# Altium PCB open-cal-board-1point2in.PcbDoc
Units mm, origin at the board's own origin, x right, y up, seen from the top; angles counter-clockwise.
Board outline 37 x 16 mm, 4 copper layers (Top Layer, Mid-Layer 1, Mid-Layer 2, Bottom Layer), stack 1.105 mm thick; 2 components, 1 nets, 10 pads, 150 vias.
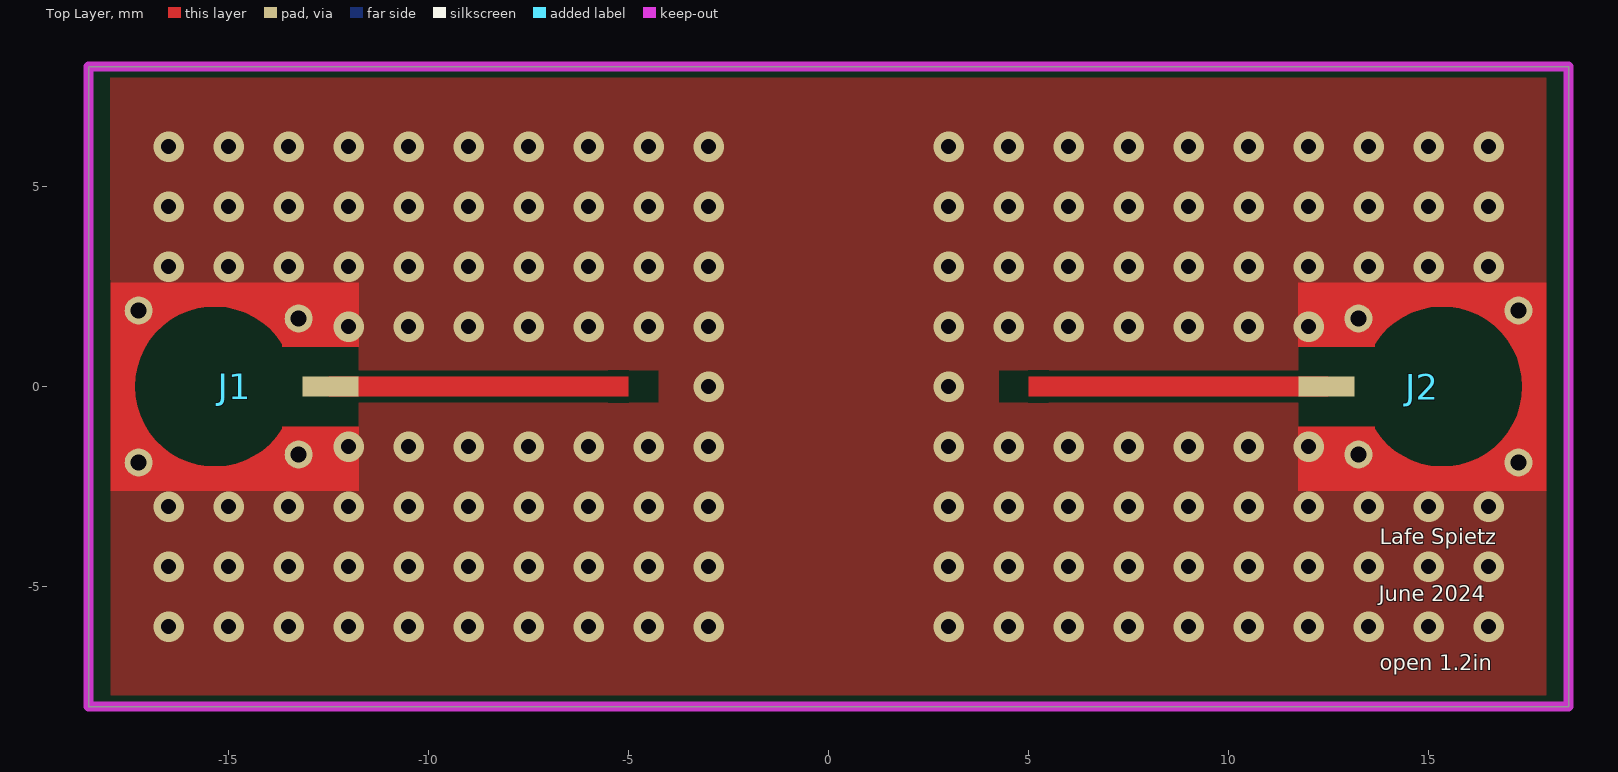
[diagram p0: Top Layer view]
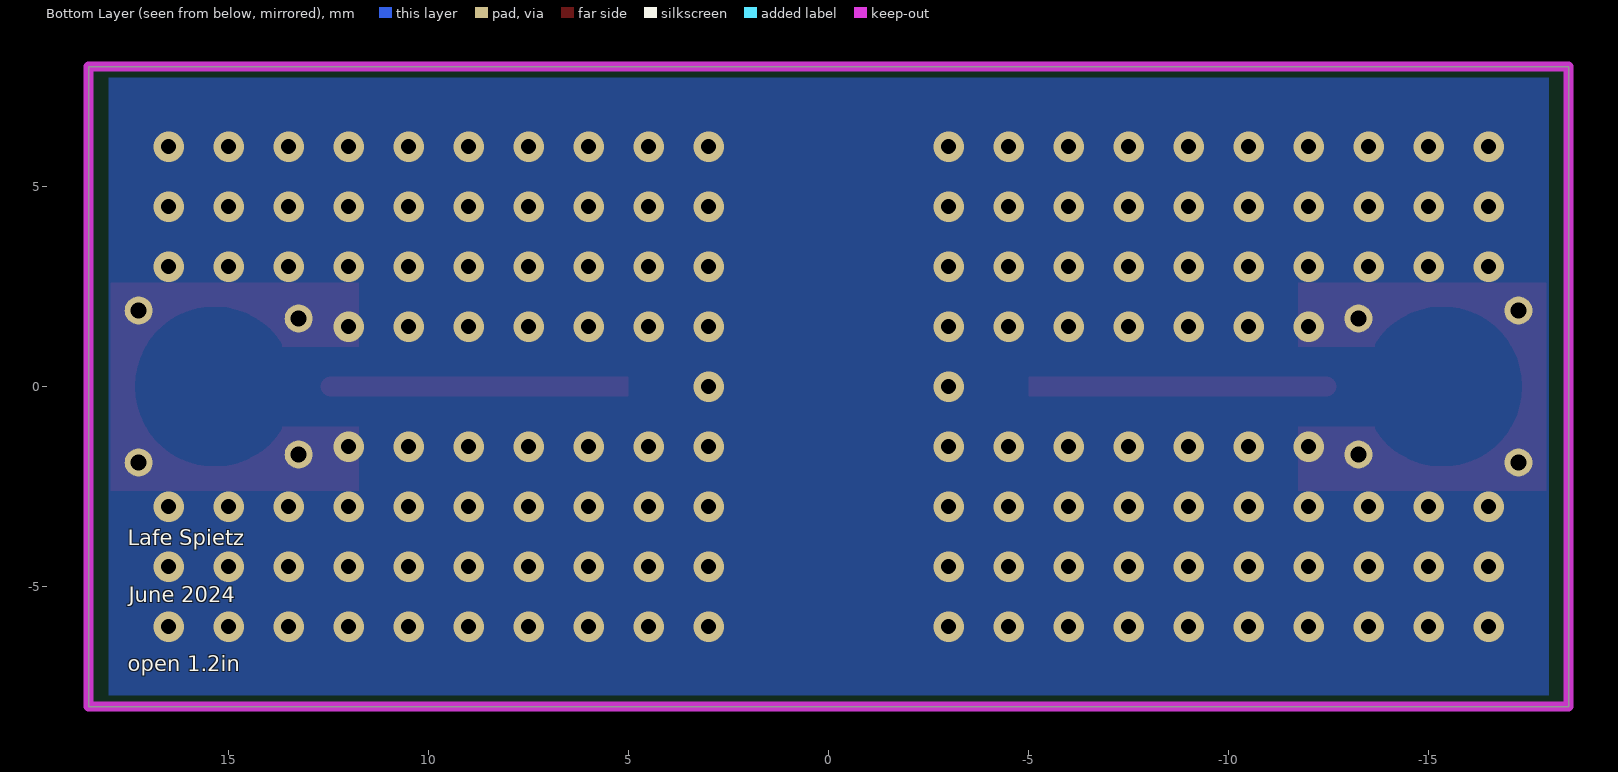
[diagram p1: Bottom Layer view, seen from below]
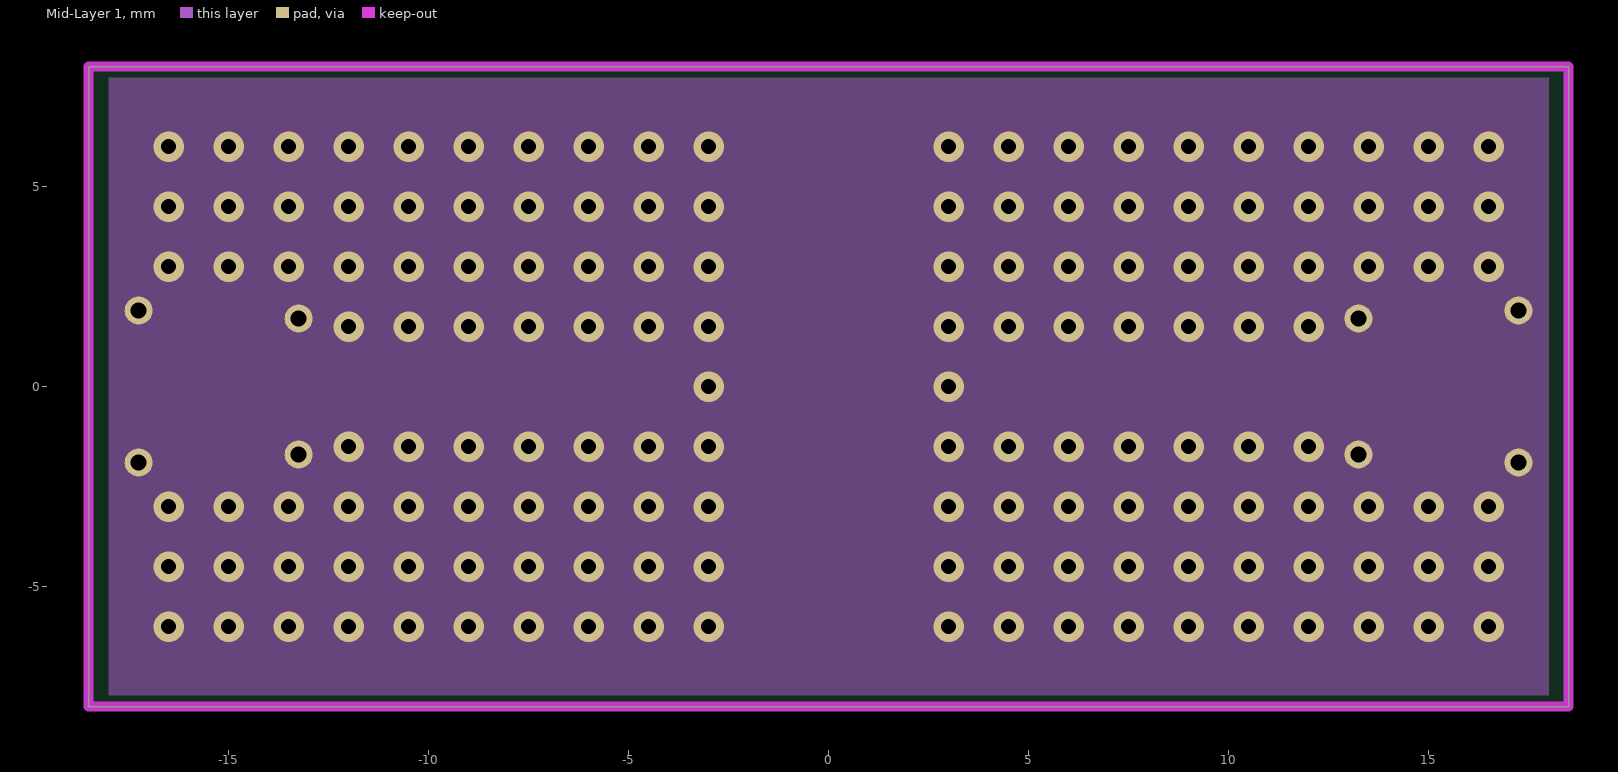
[diagram p2: Mid-Layer 1]
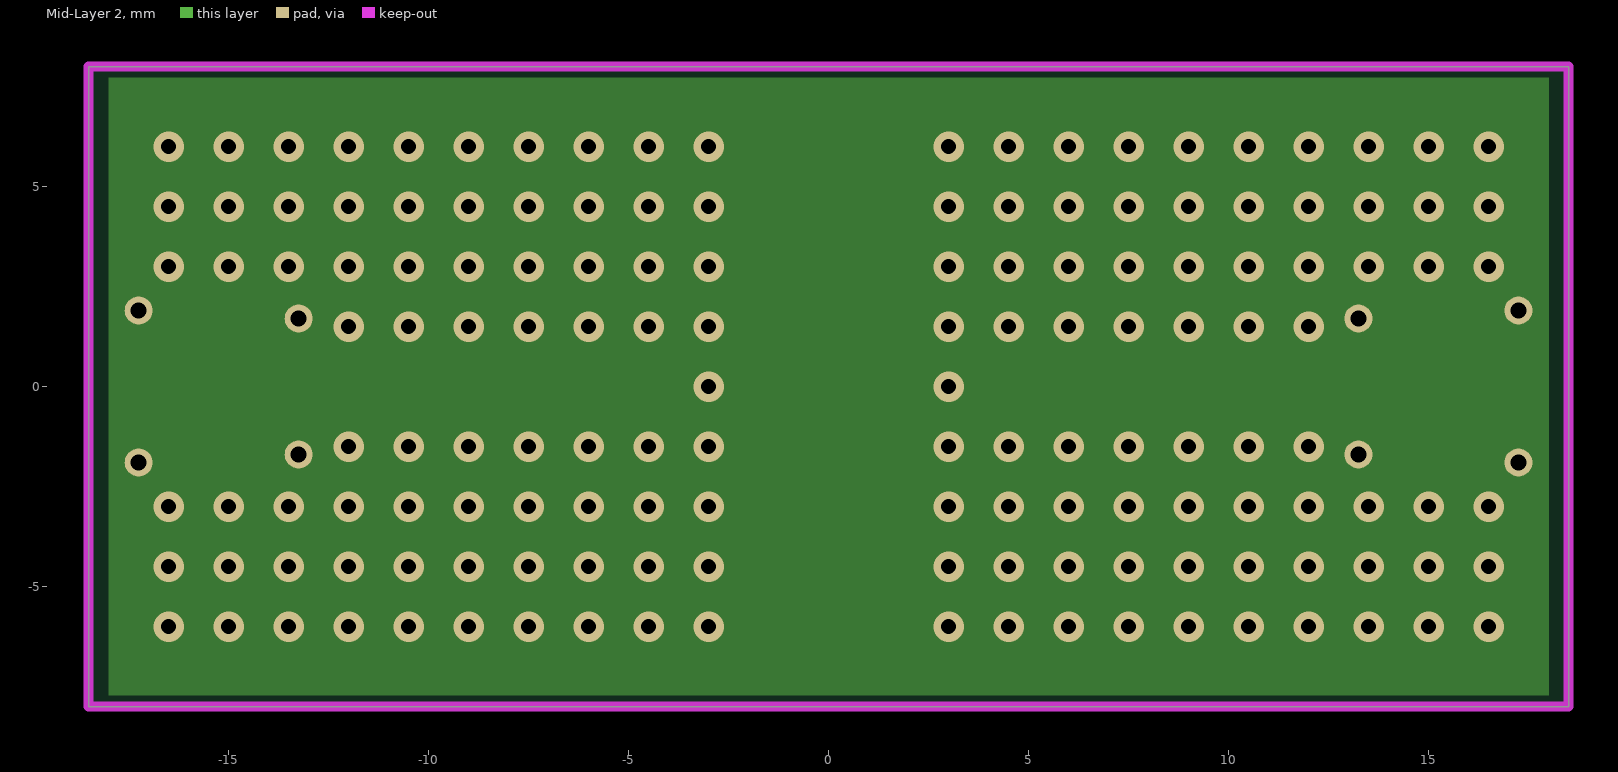
[diagram p3: Mid-Layer 2]

## Layer stack, top to bottom
Top Solder: solder mask 0.0254, SM-001, Dk 4
Top Layer: signal copper 0.035
Core1: dielectric 0.254, RO4350B, Dk 3.48
Mid-Layer 1: signal copper 0.035
Dielectric 1: prepreg 0.1778, PR7628, Dk 4.24
Dielectric 2: prepreg 0.1016, PR2116, Dk 4.17
Dielectric 3: prepreg 0.1778, PR7628, Dk 4.24
Mid-Layer 2: signal copper 0.035
Core2: dielectric 0.254, RO-4350B, Dk 3.48
Bottom Layer: signal copper 0.035
Bottom Solder: solder mask 0.0254, SM-001, Dk 4

## Board outline
-18.5,-8 -18.5,8 18.5,8 18.5,-8

## Design rules (kind name [scope] priority, off if disabled: settings)
Clearance [All] p1: gap=0.254 ignorepadtopadclearanceinfootprint=FALSE except(0: Track-Fill Track-Region Poly-Poly Poly-Region Poly-Hole; 0.095: SMDPad-Region Region-Region; 0.1: Track-Track Track-SMDPad SMDPad-Poly Via-Poly; 0.152: Arc-Poly Track-Poly Fill-Fill Fill-Poly; 0.203: Arc-SMDPad; 0.229: SMDPad-SMDPad)
PolygonConnect [All] p1: connectstyle=Direct reliefconductorwidth=0.254 reliefentries=4 polygonreliefangle="90 Angle" airgapwidth=0.254
RoutingVias [All] p1: holewidth=0.381 width=0.635 viastyle="Through Hole" minholewidth=0.127 minwidth=0.254 maxholewidth=0.711 maxwidth=1.27
SolderMaskExpansion [All] p1: expansion=0.102 istentingtop=FALSE
Width [All] p1 off: maxlimit=0.55 minlimit=0.1 preferedwidth=0.254 toplayer_prefwidth=0.1 midlayer1_minwidth=0.254 midlayer1_maxwidth=0.254 midlayer2_minwidth=0.254 midlayer2_maxwidth=0.254 bottomlayer_minwidth=0.254 bottomlayer_maxwidth=0.254 minimp=50.000000 maximp=50.000000 favimp=50.000000
Width cpw-Z-1 [All] p2 off: maxlimit=0.5 minlimit=0.174 preferedwidth=0.254 toplayer_minwidth=0.323 toplayer_prefwidth=0.406 impedanceprofiledriven=TRUE impedanceprofileid={FF6547F1-1ACB-4B88-A69B-03F59FE56022} minimp=50.000000 maximp=50.000000 favimp=50.000000
30 further rules are at their usual default settings.

## Components (designator, comment, footprint, x,y, rotation, side; value= is the part's Value field where it differs from the comment)
J1 "SMP-straight-19S141-40ML5" rosenberger-19S141-40ML5 -15.347,0 r90 top
J2 "SMP-straight-19S141-40ML5" rosenberger-19S141-40ML5 15.347,0 r270 top

## Footprints (in the part's own frame and the unit in brackets; to place one, negate y for a bottom-side part, rotate by r counter-clockwise, add the part's x,y. Pads: shape width x height; smd on the part's side, far side on the other; paste and mask are expansions set on the pad)
rosenberger-19S141-40ML5 [mm]
  rect 0.5x1.4 smd: 1(0,-2.9)
  round 0.7 hole 0.4 mask+0: gnd(-1.9,1.9) gnd(-1.7,-2.1) gnd(1.7,-2.1) gnd(1.9,1.9)
  Top Layer region: -2.6,-3.6 -2.6,2.6 2.6,2.6 2.6,-3.6 1,-3.6 1,-1.696 1.06,-1.696 1.759,-0.951 2,0.042 1.718,1.024 0.988,1.739 0,2 -0.988,1.739 -1.718,1.024 -2,0.042 -1.759,-0.951 -1.06,-1.696 -1.06,-1.696 -1,-1.696 -1,-3.6
  body extent -2.5,-3.6 2.5,2.4, height 4.1

## Part data
J1 J2: "SMP Connector Plug, Male Pin 50Ohm Surface Mount Solder", Package=None, Supplier Part Number 1=476-19S201-40ML5, Availability="In Stock", Check_prices=https://www.snapeda.com/parts/853050232/Molex/view-part/?ref=eda, MF=Molex, MP=853050232, Price=None, Purchase-URL=https://pricing.snapeda.com/search/part/853050232/?ref=eda, SnapEDA_Link=https://www.snapeda.com/parts/853050232/Molex/view-part/?ref=snap, Supplier 1=Mouser

## Via types
v1: diameter 0.762, hole 0.381, Top Layer to Bottom Layer, 150 vias

## Nets (pads, with @x,y where several pads share a name; then routed paths per layer and width w, separated by ;. In a path a pad name is that pad's centre, name@x,y a point inside that pad or via, vN(x,y) a via of type N, cw(c..) or ccw(c..) an arc to the next point about the centre after c; other vN are vias at no path point)
GND: J1.gnd J2.gnd
  other v1: -16.5,-6 -15,-6 -13.5,-6 -12,-6 -10.5,-6 -9,-6 -7.5,-6 -6,-6 -4.5,-6 -3,-6 3,-6 4.5,-6 6,-6 7.5,-6 9,-6 10.5,-6 12,-6 13.5,-6 15,-6 16.5,-6 -16.5,-4.5 -15,-4.5 -13.5,-4.5 -12,-4.5 -10.5,-4.5 -9,-4.5 -7.5,-4.5 -6,-4.5 -4.5,-4.5 -3,-4.5 3,-4.5 4.5,-4.5 6,-4.5 7.5,-4.5 9,-4.5 10.5,-4.5 12,-4.5 13.5,-4.5 15,-4.5 16.5,-4.5 -16.5,-3 -15,-3 -13.5,-3 -12,-3 -10.5,-3 -9,-3 -7.5,-3 -6,-3 -4.5,-3 -3,-3 3,-3 4.5,-3 6,-3 7.5,-3 9,-3 10.5,-3 12,-3 13.5,-3 15,-3 16.5,-3 -12,-1.5 -10.5,-1.5 -9,-1.5 -7.5,-1.5 -6,-1.5 -4.5,-1.5 -3,-1.5 3,-1.5 4.5,-1.5 6,-1.5 7.5,-1.5 9,-1.5 10.5,-1.5 12,-1.5 -3,0 3,0 -12,1.5 -10.5,1.5 -9,1.5 -7.5,1.5 -6,1.5 -4.5,1.5 -3,1.5 3,1.5 4.5,1.5 6,1.5 7.5,1.5 9,1.5 10.5,1.5 12,1.5 -16.5,3 -15,3 -13.5,3 -12,3 -10.5,3 -9,3 -7.5,3 -6,3 -4.5,3 -3,3 3,3 4.5,3 6,3 7.5,3 9,3 10.5,3 12,3 13.5,3 15,3 16.5,3 -16.5,4.5 -15,4.5 -13.5,4.5 -12,4.5 -10.5,4.5 -9,4.5 -7.5,4.5 -6,4.5 -4.5,4.5 -3,4.5 3,4.5 4.5,4.5 6,4.5 7.5,4.5 9,4.5 10.5,4.5 12,4.5 13.5,4.5 15,4.5 16.5,4.5 -16.5,6 -15,6 -13.5,6 -12,6 -10.5,6 -9,6 -7.5,6 -6,6 -4.5,6 -3,6 3,6 4.5,6 6,6 7.5,6 9,6 10.5,6 12,6 13.5,6 15,6 16.5,6
pads on no net: J1.1 J2.1
copper on no net: | length 14.1
  Top Layer w0.495: -12.447,0 -5.5,0 ; 5.25,0 12.447,0

## Polygon pours and split planes (outlines as drawn)
GND on Top Layer "NONET_L02_P-001" (solid, pour order 11): -17.951,7.9 -11.4,7.9 -11.4,2.5 -17.951,2.5
GND on Top Layer "NONET_L02_P-001" (solid, pour order 10): -17.939,-2.6 -11.4,-2.6 -11.4,-8 -17.939,-8
GND on Top Layer "NONET_L02_P-001" (solid, pour order 9): 11.5,7.9 17.947,7.9 17.947,2.5 11.5,2.5
GND on Top Layer "NONET_L02_P-001" (solid, pour order 8): 11.5,-2.6 17.947,-2.6 17.947,-8 11.5,-8
GND on Top Layer "GND_L01_P000" (solid, pour order 0): -11.747,-8 -5,-8 -5,8 -11.747,8
GND on Top Layer "NONET_L02_P-001" (solid, pour order 7): -5,-0.408 -5,-8 5,-8 5,-0.405 4.25,-0.405 4.25,0.408 5,0.408 5,8 -5,8 -5,0.407 -4.25,0.407 -4.25,-0.408
GND on Top Layer "GND_L01_P005" (solid, pour order 5): 5,-8 11.747,-8 11.747,8 5,8
GND on Mid-Layer 1 "GND_L02_P001" (solid, pour order 1): -18,8 18,8 18,-8 -18,-8
GND on Mid-Layer 2 "GND_L03_P002" (solid, pour order 2): -18,8 18,8 18,-8 -18,-8
GND on Bottom Layer "GND_L04_P003" (solid, pour order 3): -18,8 18,8 18,-8 -18,-8
no net on Bottom Solder "NONET_L02_P-001" (solid): 18,8 18,-8 -18,-8 -18,8
no net on Top Solder "NONET_L02_P-001" (solid): 13.5,-3 13.5,-8 12,-8 12,-3
no net on Top Solder "NONET_L02_P-001" (solid): 18,7.96 18,3.04 11.576,3.04 11.576,7.96
no net on Top Solder "NONET_L02_P-001" (solid): -18,8.06 -18,3.14 -11.826,3.14 -11.826,8.06
no net on Top Solder "NONET_L02_P-001" (solid): -18,-3 -18,-8 -11,-8 -11,-3

## Keep-outs
Keep-Out Layer:
  lines w0.254: -18.5,-8 5,-8 18.5,-8 18.5,8 -18.5,8 -18.5,-8

## Other copper
Top Layer:
  rectangle: -5.5,-0.25 -5,0.25
  rectangle: 5,-0.247 5.5,0.25

## Silkscreen, mask and mechanical layers (free items; w line width, h text height)
Top Overlay:
  text "Lafe Spietz" at 13.777,-3.946 h0.38
  text "June 2024" at 13.752,-5.373 h0.38
  text "open 1.2in" at 13.777,-7.096 h0.38
Bottom Overlay:
  text "Lafe Spietz" at 17.523,-3.971 h0.38
  text "June 2024" at 17.498,-5.398 h0.38
  text "open 1.2in" at 17.523,-7.121 h0.38
Top Solder:
  rectangle: -12.5,0.971 -11.076,8
  rectangle: 10.239,0.409 11.764,2.06
  rectangle: 10.237,-2.055 11.762,-0.404
  rectangle: -11.75,0.4 -10.225,3.599
  rectangle: -11.749,-2.09 -10.327,-0.4
  rectangle: 3.25,-5.5 4.775,1.506
  rectangle: -12.525,-8.037 -11,-1
  rectangle: 10.899,0.971 12.424,8
  rectangle: 10.909,-8 12.434,-0.987
  rectangle: -11.25,-8 11.25,8
Bottom Solder:
  pour cut-out: 18.5,-8 13,-8 13,-3.25 18.5,-3.25